# Altium PCB BLETracker_v03.PcbDoc
Units mil, origin at the board's own origin, x right, y up, seen from the top; angles counter-clockwise.
Board outline 1575 x 1005 mil, 2 copper layers (Top Layer, Bottom Layer); 4 components, 6 nets, 35 pads, 3 vias.
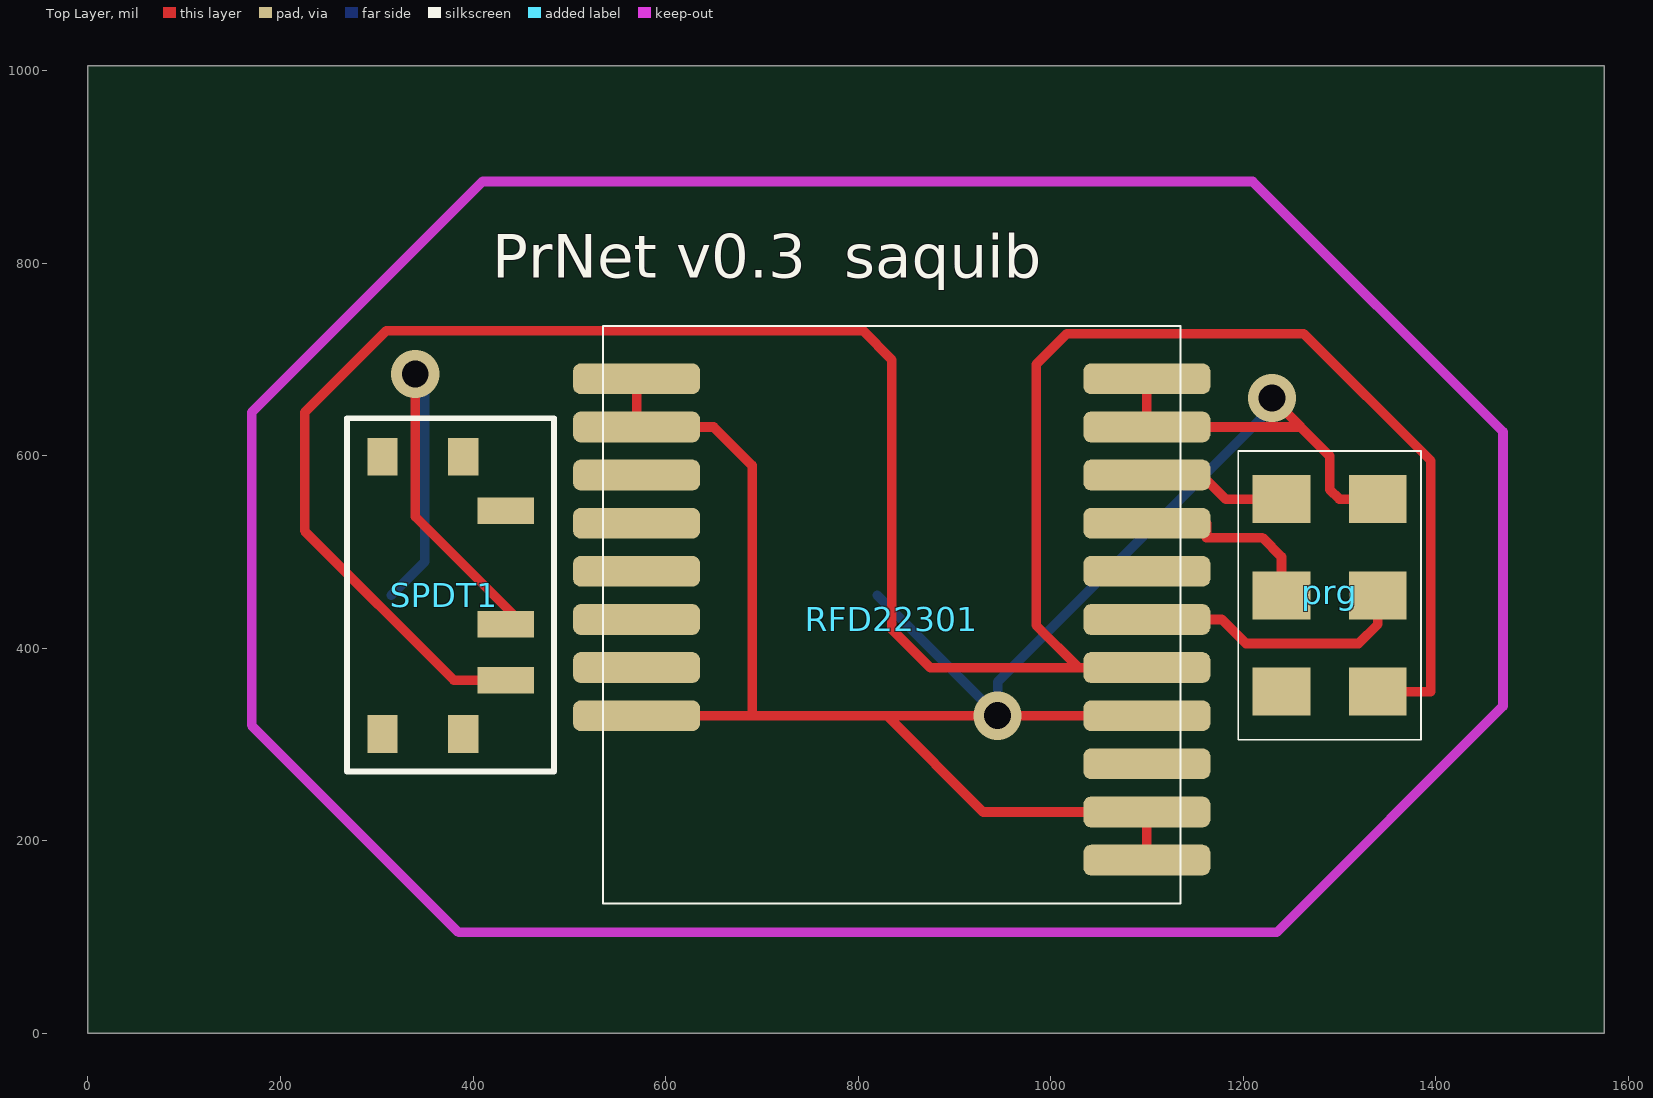
[diagram p0: Top Layer view]
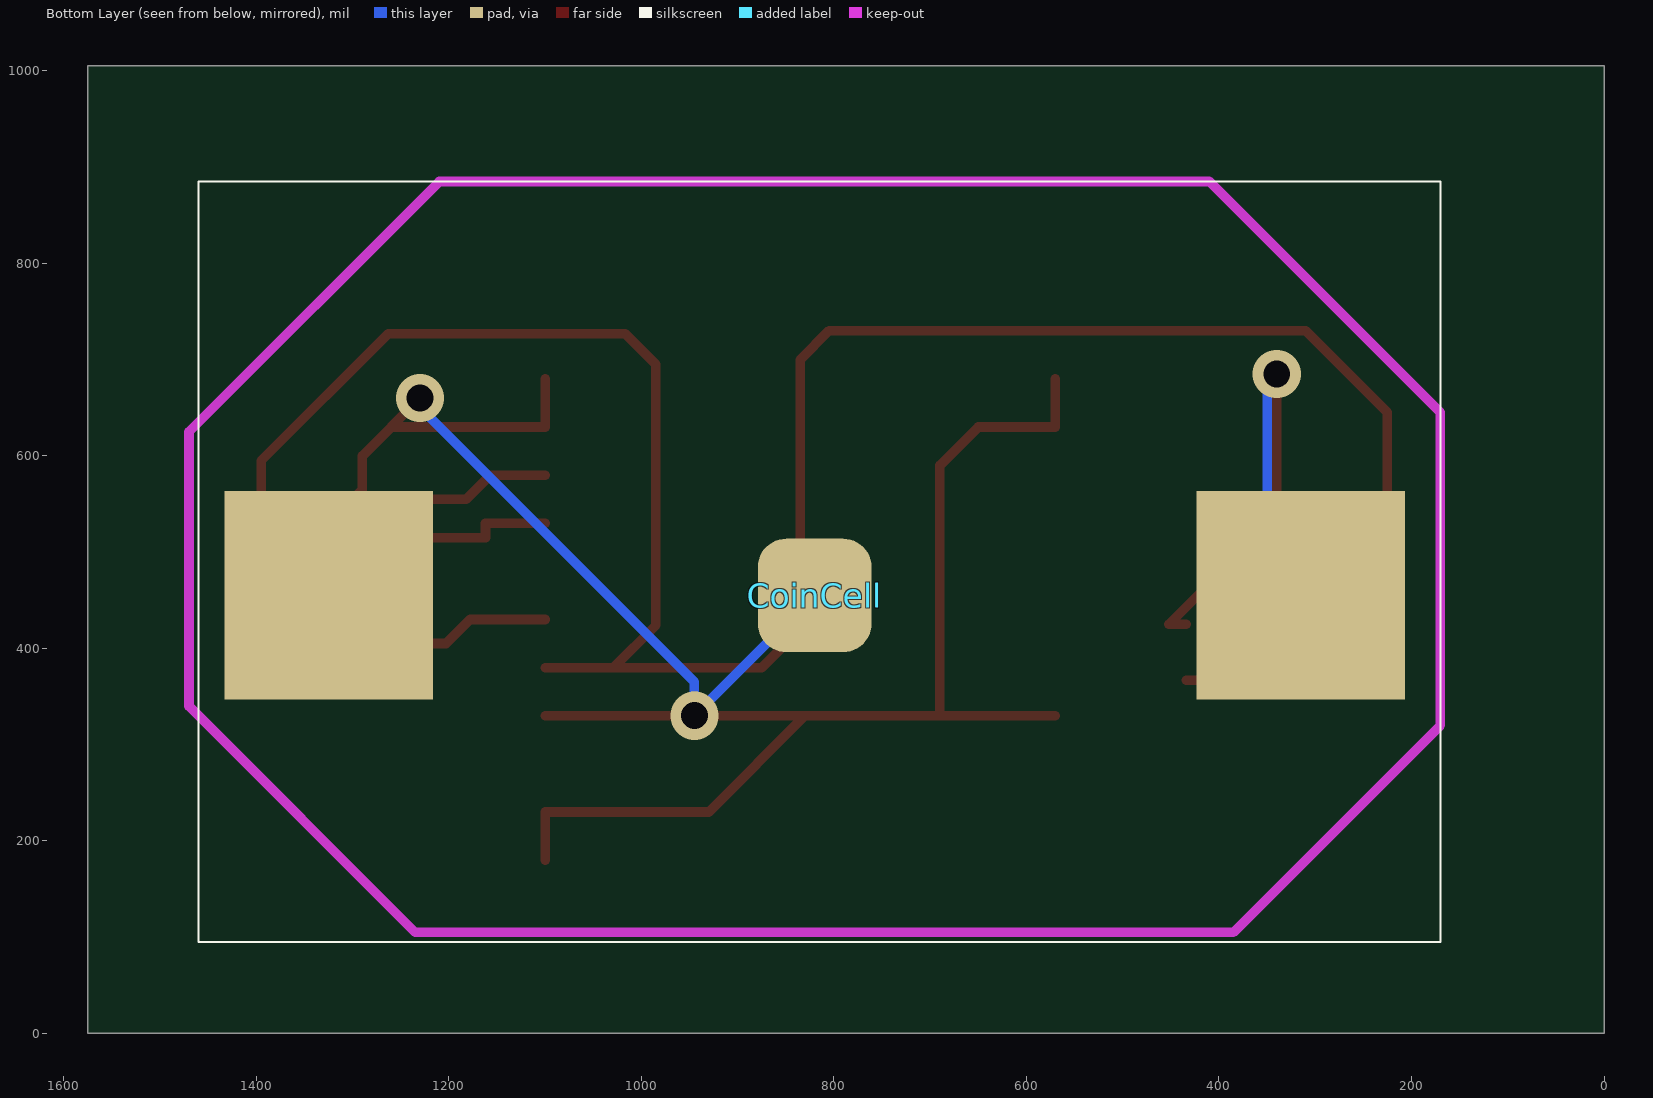
[diagram p1: Bottom Layer view, seen from below]

## Layer stack, top to bottom
Top Solder: solder mask 0.4, Solder Resist, Dk 3.5
Top Layer: signal copper 1.4
Dielectric 1: dielectric 12.6, FR-4, Dk 4.8
Bottom Layer: signal copper 1.4
Bottom Solder: solder mask 0.4, Solder Resist, Dk 3.5

## Board outline
0,0 1575,0 1575,1005 0,1005

## Design rules (kind name [scope] priority, off if disabled: settings)
Clearance [All] p1: gap=10
PolygonConnect [All] p1: connectstyle=Relief reliefconductorwidth=10 reliefentries=4 polygonreliefangle="90 Angle" airgapwidth=10
RoutingVias [All] p1: holewidth=28 width=50 viastyle="Through Hole" minholewidth=28 minwidth=50 maxholewidth=28 maxwidth=50
SolderMaskExpansion [All] p1: expansion=4
Width [All] p1: maxlimit=10 minlimit=10 preferedwidth=10
30 further rules are at their usual default settings.

## Components (designator, comment, footprint, x,y, rotation, side; value= is the part's Value field where it differs from the comment)
CoinCell "Coin Cell Holder" CoinCell 820,455 r180 bottom
prg "Programmer" ProgrammingHeader 1290,455 r90 top
RFD22301 "RFD22301 module" RFD22301 835,430 r0 top
SPDT1 "CUS-12B SPDT" CUS-12B 370,455 r270 top

## Footprints (in the part's own frame and the unit in brackets; to place one, negate y for a bottom-side part, rotate by r counter-clockwise, add the part's x,y. Pads: shape width x height; smd on the part's side, far side on the other; paste and mask are expansions set on the pad)
CoinCell [mm] "coin cell holder"
  rect 5.5x5.5 smd: 1(-12.827,0) 3(12.827,0)
  rrect50% 3x3 smd: 2(0,0)
  silkscreen extent -16.26,-9.14 16.51,10.92
CUS-12B [mil] "CUS-12B switch"
  rect 39.37x31.5 smd: 0(-144,-64) 0(-144,20) 0(144,-64) 0(144,20)
  rect 27.56x59.06 smd: 1(-88,64) 2(30,64) 3(88,64)
  silkscreen extent -184,-101 183,114
ProgrammingHeader [mil] "Programming Header"
  rect 50x60 smd: 1(-100,-50) 2(0,-50) 3(100,-50) 4(100,50) 5(0,50) 6(-100,50)
  silkscreen extent -150,-95 150,95
RFD22301 [mil] "RFD22301 module 0.6x0.6 inches"
  rrect50% 132x32 smd: 1(-265,250) 2(-265,200) 3(-265,150) 4(-265,100) 5(-265,50) 6(-265,0) 7(-265,-50) 8(-265,-100) 9(265,-250) 10(265,-200) 11(265,-150) 12(265,-100) 13(265,-50) 14(265,0) 15(265,50) 16(265,100) 17(265,150) 18(265,200) 19(265,250)
  silkscreen extent -300,-295 300,305

## Part data
CoinCell: library part CoinCellHolder
prg: library part ProgrammingHeader
RFD22301: library part RFD22301_Footprint
SPDT1: library part CUS-12B

## Via types
v1: diameter 50, hole 28, Top Layer to Bottom Layer, 3 vias

## Nets (pads, with @x,y where several pads share a name; then routed paths per layer and width w, separated by ;. In a path a pad name is that pad's centre, name@x,y a point inside that pad or via, vN(x,y) a via of type N, cw(c..) or ccw(c..) an arc to the next point about the centre after c; other vN are vias at no path point)
GND: CoinCell.2 prg.3 RFD22301.1 RFD22301.2 RFD22301.8 RFD22301.9 RFD22301.10 RFD22301.12 RFD22301.18 RFD22301.19 | length 2346.8
  Top Layer w10: RFD22301.8 690,330 ; RFD22301.1 RFD22301.2 650,630 690,590 690,330 ; RFD22301.9 RFD22301.10 930,230 830,330 ; RFD22301.12 v1(945,330) 830,330 ; RFD22301.19 RFD22301.18 1260,630 ; v1(1230,660) 1290,600 1290,565 1300,555 prg.3 ; 690,330 830,330
  Bottom Layer w10: CoinCell.2 v1(945,330) 945,365 1230,650 v1(1230,660)
RESET: prg.2 RFD22301.14 | length 288.6
  Top Layer w10: RFD22301.14 1178,430 1203,405 1320,405 1340,425 prg.2
RX: prg.4 RFD22301.17 | length 150.4
  Top Layer w10: RFD22301.17 1157,580 1182,555 prg.4
TX: prg.5 RFD22301.16 | length 203.3
  Top Layer w10: RFD22301.16 1162,530 1162,515 1220,515 1240,495 prg.5
VCC: prg.1 RFD22301.13 SPDT1.3 | length 2721.6
  Top Layer w10: SPDT1.3 380,367 225,522 225,645 310,730 805,730 835,700 835,420 875,380 1029,380 ; RFD22301.13 1029,380 ; prg.1 1395,355 1395,595 1263,727 1017,727 985,695 985,424 1029,380
VRAW: CoinCell.3 SPDT1.2 | length 573
  Top Layer w10: v1(340,685) 340,537 452,425 SPDT1.2
  Bottom Layer w10: CoinCell.3 350,490 350,675 v1(340,685)
pads on no net: CoinCell.1 prg.6 RFD22301.3 RFD22301.4 RFD22301.5 RFD22301.6 RFD22301.7 RFD22301.11 RFD22301.15 SPDT1.0 SPDT1.1

## Keep-outs
Keep-Out Layer:
  lines w10: 170,320 385,105 1235,105 1470,340 1470,625 1210,885 410,885 170,645 170,320

## Silkscreen, mask and mechanical layers (free items; w line width, h text height)
Top Overlay:
  text "PrNet v0.3  saquib" at 420,785 h45